# Altium PCB LedDimming.PcbDoc
Units mm, origin at the board's own origin, x right, y up, seen from the top; angles counter-clockwise.
Board outline 30 x 10 mm, 2 copper layers (Top Layer, Bottom Layer); 26 components, 21 nets, 67 pads, 5 vias.
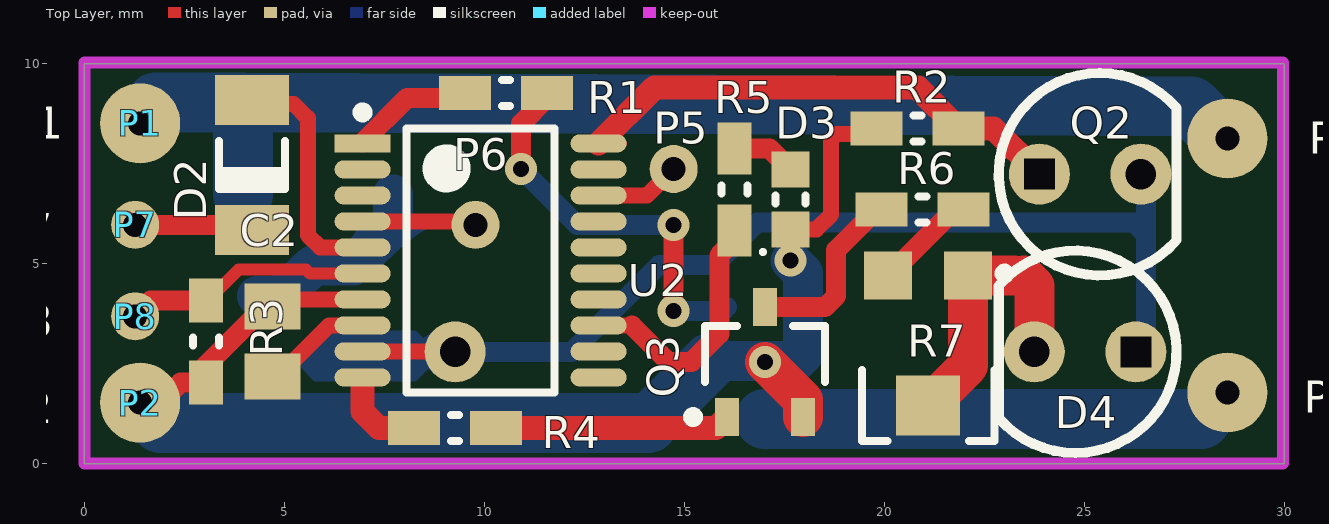
[diagram p0: Top Layer view]
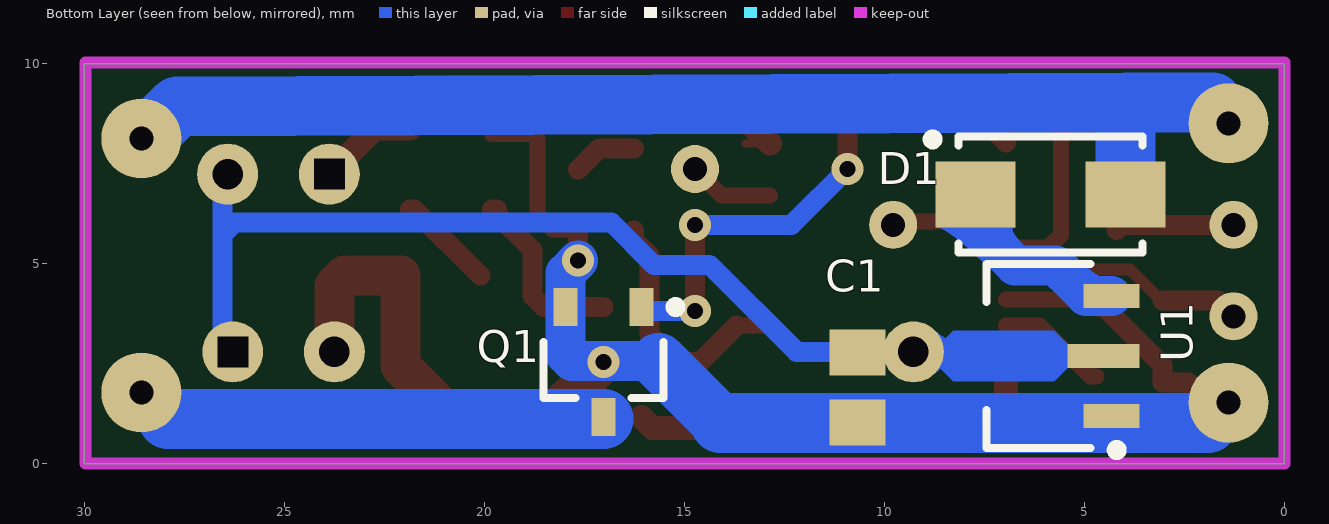
[diagram p1: Bottom Layer view, seen from below]

## Layer stack, top to bottom
Top Solder: solder mask 0.0102, Solder Resist, Dk 3.5
Top Layer: signal copper 0.0356
Dielectric 1: dielectric 0.32, FR-4, Dk 4.8
Bottom Layer: signal copper 0.0356
Bottom Solder: solder mask 0.0102, Solder Resist, Dk 3.5

## Board outline
0,0 30,0 30,10 0,10

## Design rules (kind name [scope] priority, off if disabled: settings)
Clearance [All] p1: gap=0.2 ignorepadtopadclearanceinfootprint=FALSE
PolygonConnect [All] p1: connectstyle=Relief reliefconductorwidth=0.254 reliefentries=4 polygonreliefangle="90 Angle" airgapwidth=0.254
RoutingVias [All] p1: holewidth=0.4 width=0.7 viastyle="Through Hole" minholewidth=0.3 minwidth=0.8 maxholewidth=0.5 maxwidth=0.6
SolderMaskExpansion [All] p1: expansion=0.102
Width Power [InNet('VCC_5V') Or InNet('VCC_12V')or InNet('GND') Or InNet('NetD1_1')or InNet('NetP3_1')] p1: maxlimit=2 minlimit=0.254 preferedwidth=1
Width [All] p2: maxlimit=1 minlimit=0.2 preferedwidth=0.5
30 further rules are at their usual default settings.

## Components (designator, comment, footprint, x,y, rotation, side; value= is the part's Value field where it differs from the comment)
C1 "106" CAPC2012X12N 10.668,1.905 r90 bottom
C2 "104" CAPC2012X12N 4.699,3.048 r270 top
D1 "1N4007" SODFL504X244-2N 5.842,6.731 r180 bottom
D2 "1N4148" DIOMELF3515N 4.191,7.467 r90 top
D3 "LED0603" DIOC1608X06N 17.653,6.604 r90 top
D4 "LED IR 3mm" LED_IR_3mm 26.289,2.794 r180 top
P1 "P" Point#1 1.397,8.509 r0 top
P2 "P" Point#1 1.397,1.524 r0 top
P3 "P" Point#1 28.575,1.778 r0 top
P4 "P" Point#1 28.575,8.128 r0 top
P5 "P" Point#2 14.732,7.366 r0 top
P6 "P" Point#2 9.779,5.969 r0 top
P7 "P" Point#2 1.27,5.969 r0 top
P8 "P" Point#2 1.27,3.683 r0 top
Q1 "AO3400" SOT95P278X125-3N 17.018,2.54 r270 bottom
Q2 "LED IR 3mm" LED_IR_3mm 23.876,7.239 r0 top
Q3 "C1815" SOT95P278X125-3N 17.018,2.54 r90 top
R1 "1K" RESC2608X06N_0603#1 10.541,9.271 r0 top
R2 "10K" RESC2608X06N_0603#1 20.828,8.382 r0 top
R3 "10K" RESC2608X06N_0603#2 3.048,3.048 r90 top
R4 "1K" RESC2608X06N_0603#1 9.271,0.889 r0 top
R5 "1K" RESC2608X06N_0603#1 16.256,6.858 r270 top
R6 "100R" RESC2608X06N_0603#1 20.955,6.35 r0 top
R7 "1K" Var_SMD_3x3 21.098,1.449 r180 top
U1 "CJA1117B-5.0 SOT89" SOT89-150P409X160-3N 6.118,2.691 r0 bottom
U2 "STM8S003" TSOP65P640X120-20N 9.906,5.08 r0 top value=STM8S003F3

## Footprints (in the part's own frame and the unit in brackets; to place one, negate y for a bottom-side part, rotate by r counter-clockwise, add the part's x,y. Pads: shape width x height; smd on the part's side, far side on the other; paste and mask are expansions set on the pad)
CAPC2012X12N [mm] "Chip Capacitor, 2-Leads, Body 2.00x1.25mm, IPC Medium Density"
  rect 1.15x1.4 smd: 1(-0.875,0) 2(0.875,0)
  body extent -1.1,-0.67 1.1,0.67, height 1.2
DIOC1608X06N [mm] "Chip Diode, 2-Leads, Body 1.60x0.80mm, IPC Medium Density"
  rect 0.9x0.95 smd: 1(-0.75,0) 2(0.75,0)
  silkscreen extent -1.36,-0.38 0.1,0.74, body extent -0.9,-0.4 0.9,0.4, height 0.6
DIOMELF3515N [mm] "MELF Diode, 2-Leads, Body 3.50x1.55mm, IPC Medium Density"
  rect 1.25x1.85 smd: 1(-1.625,0) 2(1.625,0)
  silkscreen extent -0.6,-0.83 0.6,0.82, body extent -1.85,-0.85 1.85,0.85, height 1.69
LED_IR_3mm [mil] "IR Transmitter and Receiver Led"
  round 60 hole 30: 1(100,0)
  round 60 hole 30 square: 2(0,0)
  silkscreen extent -40,-100 135,100
Point#1 [mm]
  round 2 hole 0.6: 1(0,0)
Point#2 [mm]
  round 1.2 hole 0.6: 1(0,0)
RESC2608X06N_0603#1 [mm] "Chip Resistor, 2-Leads, Body 2.60x0.80mm, IPC Medium Density"
  rect 1.3x0.85 smd: 1(-1.025,0) 2(1.025,0)
  silkscreen extent -0.1,-0.33 0.1,0.33, body extent -1.3,-0.4 1.3,0.4, height 0.6
RESC2608X06N_0603#2 [mm] "Chip Resistor, 2-Leads, Body 2.60x0.80mm, IPC Medium Density"
  rect 1.1x0.85 smd: 1(-1.025,0) 2(1.025,0)
  silkscreen extent -0.1,-0.33 0.1,0.33, body extent -1.3,-0.4 1.3,0.4, height 0.6
SODFL504X244-2N [mm] "SODFL, 2-Leads, Body 2.70x5.04mm, IPC Medium Density"
  rect 2x1.65 smd: 1(-1.875,0) 2(1.875,0)
  silkscreen extent -3.08,-1.45 2.3,1.5, body extent -2.3,-1.45 2.3,1.45, height 2.44
SOT89-150P409X160-3N [mm] "SOT89, 3-Leads, Body 4.50x2.45mm, Pitch 1.50mm, Lead Span 4.1mm, IPC Medium Density"
  rect 1.4x0.6 smd: 1(-1.8,1.5) 3(-1.8,-1.5)
  rect 1.8x0.6 smd: 2(-1.6,0)
  Top Layer region: -0.7,0.3 -0.365,0.635 2.165,0.635 2.5,0.3 2.5,-0.3 2.165,-0.635 -0.365,-0.635 -0.7,-0.3
  silkscreen extent -2.05,-2.3 1.32,2.47, body extent -1.28,-2.3 1.32,2.3, height 1.6
SOT95P278X125-3N [mm] "SOT23, 3-Leads, Body 2.92x2.78mm, Pitch 0.95mm, IPC Medium Density"
  rect 0.95x0.6 smd: 1(-1.375,0.95) 2(-1.375,-0.95) 3(1.375,0)
  silkscreen extent -1.5,-1.5 0.9,1.92, body extent -0.9,-1.52 0.9,1.52, height 1.25
TSOP65P640X120-20N [mm] "TSOP, 20-Leads, Body 6.50x4.40mm, Pitch 0.65mm, IPC Medium Density"
  rect 1.4x0.45 smd: 1(-2.95,2.925)
  oval 1.4x0.45 smd: 2(-2.95,2.275) 3(-2.95,1.625) 4(-2.95,0.975) 5(-2.95,0.325) 6(-2.95,-0.325) 7(-2.95,-0.975) 8(-2.95,-1.625) 9(-2.95,-2.275) 10(-2.95,-2.925) 11(2.95,-2.925) 12(2.95,-2.275) 13(2.95,-1.625) 14(2.95,-0.975) 15(2.95,-0.325) 16(2.95,0.325) 17(2.95,0.975) 18(2.95,1.625) 19(2.95,2.275) 20(2.95,2.925)
  silkscreen extent -3.07,-3.3 1.85,3.82, body extent -3.2,-3.3 3.2,3.3, height 1.2
Var_SMD_3x3 [mm] "3x3 102-1K SMD 3303W"
  rect 1.2x1.2 smd: 1(-1,-3.25) 3(1,-3.25)
  rect 1.6x1.5 smd: 2(0,0)
  silkscreen extent -2.03,-3.43 1.65,0.89

## Part data
C1: library part "Capacitor 106"
C2: library part "Capacitor 104 0603"
D1: library part "1N4007_SMD Diode", "1N4007_SMD"
D2: library part 1N4148_SMD, "DIODE GEN PURP 75V 200MA DO213AA", Supplier Part Number 1=1N4148UR-1-ND, Supplier 1=Digi-Key
P1 P2 P3 P4 P5 P6 P7 P8: library part Point
Q1: library part "AO3400  MOSFET SOT23-3", "AO3400  MOSFET SOT23-3"
Q3: library part "Transitor C1815 NPN", "SOT-23 Plastic-Encapsulate Transistors"
R1 R4 R5: library part 1k_0603_5%, "Thick Film Resistors - SMD 0603 1kOHMS 5% 1/10WATT", Supplier Part Number 1=CR0603-JW-101ELFCT-ND, Supplier 1=Digi-Key
R2 R3: library part R10k_0603_5%, "RES SMD 10K OHM 1% 1/4W 0603", Supplier Part Number 1=541-10.0KSCT-ND, Supplier 1=Digi-Key
R6: library part R100_0603_5%, "Thick Film Resistors - SMD 0603 100OHMS 5% 1/10WATT", Supplier Part Number 1=CR0603-JW-101ELFCT-ND, Supplier 1=Digi-Key
R7: library part "Varistor 3x3 SMD 1KOhm", "Varistor 3x3 SMD 1KOhm 5% 1/10WATT", Supplier Part Number 1=CR0603-JW-101ELFCT-ND, Supplier 1=Digi-Key
U1: "CJA1117B-5.0 SOT89 Power IC 1A 5V_IC"
U2: "MCU 8-bit STM8S STM8 CISC 8KB Flash 3.3V/5V 20-Pin TSSOP T/R", Supplier Part Number 1=497-18051-1-ND

## Free pads (board coordinates)
  round 1.524 hole 0.762: 2(9.271,2.794)

## Via types
v1: diameter 0.8, hole 0.4, Top Layer to Bottom Layer, 5 vias

## Nets (pads, with @x,y where several pads share a name; then routed paths per layer and width w, separated by ;. In a path a pad name is that pad's centre, name@x,y a point inside that pad or via, vN(x,y) a via of type N, cw(c..) or ccw(c..) an arc to the next point about the centre after c; other vN are vias at no path point)
D_Input: P8.1 R3.2 U2.6 | length 6.2
  Top Layer w0.3: R3.2 3.079,4.073 3.854,4.848 5.544,4.848 5.637,4.755 U2.6
  Top Layer w0.5: P8.1 1.66,4.073 R3.2
D_Output: D2.1 P7.1 | length 3
  Top Layer w0.5: P7.1 4.064,5.969 D2.1
GND: C1.1 C2.1 D3.1 P2.1 Q1.2 Q3.2 R2.1 R3.1 U1.1 U2.7 | length 33.9
  Top Layer w0.4: C2.1 4.881,4.105 U2.7 ; D3.1 18.3,5.854 18.669,6.223 18.669,8.11 18.805,8.246 19.803,8.246 R2.1
  Top Layer w0.5: P2.1 1.905,1.524 2.404,2.023 R3.1 3.048,2.462 4.509,3.923 C2.1 ; v1(17.653,5.08) D3.1
  Top Layer w1: v1(17.018,2.54) 17.968,1.59 Q3.2
  Bottom Layer w1: P2.1@1.27,1.524 P2.1 ; 15.646,2.565 17.805,2.565 17.968,2.728 Q1.2 17.968,4.765 v1(17.653,5.08)
  Bottom Layer w1.2: P2.1 P2.1@1.905,1.016
  Bottom Layer w1.4: 14.097,1.016 15.646,2.565
  Bottom Layer w1.5: P2.1@1.905,1.016 14.097,1.016
NetC2_2: C2.2 U2.8 | length 2.8
  Top Layer w0.4: C2.2 4.84,2.173 6.122,3.455 U2.8
NetD1_1: D1.1 U1.3 | length 4.9
  Bottom Layer w1: U1.3 4.953,4.191 5.715,4.953 6.731,4.953 7.717,5.939 D1.1
NetD2_2: D2.2 U2.5 | length 6.1
  Top Layer w0.2: U2.5@6.831,5.53 U2.5
  Top Layer w0.4: D2.2@4.191,8.991 5.233,8.991 5.588,8.636 5.588,5.715 5.898,5.405 U2.5
NetD3_2: D3.2 R5.1 | length 1.6
  Top Layer w0.5: R5.1 17.124,7.883 D3.2
NetD4_1: D4.1 R7.1 R7.2 | length 7.1
  Top Layer w0.4: 23.241,4.699 23.495,4.699
  Top Layer w1: R7.2 22.098,2.449 R7.1 23.241,4.699 ; 23.495,4.699 23.749,4.445 D4.1
NetP3_1: P3.1 Q1.3 | length 11.8
  Bottom Layer w1.2: P3.1@27.912,1.115 P3.1
  Bottom Layer w1.5: Q1.3@17.018,1.115 P3.1@27.912,1.115
NetQ1_1: Q1.1 R1.2 | length 10.3
  Top Layer w0.2: v1(10.922,7.366) v1@11.049,7.366
  Top Layer w0.5: v1(10.922,7.366) 10.922,8.5 R1.2@11.566,9.144 ; v1(14.732,3.81) v1(14.732,5.969)
  Bottom Layer w0.2: v1@14.605,6.096 v1(14.732,5.969)
  Bottom Layer w0.5: v1(10.922,7.366) 12.319,5.969 v1(14.732,5.969) ; v1(14.732,3.81) 15.963,3.81 Q1.1
NetQ2_2: Q2.2 R2.2 U2.20 | length 13.7
  Top Layer w0.2: U2.20 U2.20@13.466,8.005 ; Q2.2@23.25,6.985 Q2.2@23.876,6.985
  Top Layer w0.6: U2.20 14.249,9.398 20.837,9.398 R2.2 22.733,8.382 Q2.2
NetQ3_1: Q3.1 R4.2 | length 5.9
  Top Layer w0.6: R4.2 15.792,0.889 Q3.1
NetQ3_3: Q3.3 R6.1 | length 4.6
  Top Layer w0.5: Q3.3 18.52,3.915 18.796,4.191 18.796,5.343 19.803,6.35 R6.1@19.685,6.35
NetR1_1: R1.1 U2.1 | length 3
  Top Layer w0.5: U2.1@6.956,8.03 8.07,9.144 R1.1@9.516,9.144
NetR4_1: R4.1 U2.10 | length 2.2
  Top Layer w0.6: U2.10@6.956,2.08 6.956,1.299 7.366,0.889 R4.1
NetR5_2: R5.2 U2.13 | length 6.6
  Top Layer w0.2: R5.2@16.129,5.706 R5.2
  Top Layer w0.4: U2.13 13.69,3.455
  Top Layer w0.5: 13.69,3.455 14.605,2.54 15.176,2.54 15.875,3.238 15.875,5.207 16.256,5.588 R5.2
NetR6_2: R6.2 R7.3 | length 2.5
  Top Layer w0.2: R7.3 R7.3@20.098,4.722
  Top Layer w0.5: R7.3 21.749,6.35 R6.2@21.853,6.35
RESET: P6.1 U2.4 | length 2.9
  Top Layer w0.4: U2.4 P6.1@9.693,6.055
  Top Layer w0.5: P6.1@9.693,6.055 P6.1
SWIM: P5.1 U2.18 | length 2.1
  Top Layer w0.4: U2.18 14.071,6.705 P5.1
VCC_5V: C1.2 D4.2 pad.2 Q2.1 U1.2 U2.9 | length 27
  Top Layer w0.4: U2.9 9.26,2.805 pad.2
  Bottom Layer w0.5: 7.239,2.794 pad.2 12.192,2.794 14.365,4.967 15.762,4.967 16.822,6.027 17.257,6.027 17.259,6.03 18.047,6.03 18.049,6.027 26.231,6.027 26.543,5.715 ; Q2.1@26.416,6.985 26.543,6.858 26.543,5.715 ; D4.2@26.543,3.175 26.543,5.715
VCC_12V: D1.2 P1.1 P4.1 | length 29.4
  Bottom Layer w1: P1.1@1.73,8.969 P1.1@1.793,8.905
  Bottom Layer w1.5: P1.1@1.794,9.033 3.938,9.025 27.67,8.933 28.475,8.128 P4.1 ; 3.938,8.933 3.967,8.904 D1.2
pads on no net: U2.2 U2.3 U2.11 U2.12 U2.14 U2.15 U2.16 U2.17 U2.19

## Keep-outs
Keep-Out Layer:
  lines w0.3: 0,0 7.493,0 22.479,0 29.972,0 29.972,10.033 0,10.033 0,0

## Silkscreen, mask and mechanical layers (free items; w line width, h text height)
Bottom Solder:
  lines w1.2: 1.397,1.524 1.651,1.524 2.159,1.016 13.462,1.016 14.224,1.016 15.748,2.54 17.653,2.54 17.907,2.794 17.907,3.81 ; 1.397,8.509 1.905,8.509 2.413,9.017 27.305,9.017 28.194,8.128 ; 17.272,1.143 28.067,1.143

## Dimensions
0,0 to 0,10.033 on Mechanical 1